# Altium PCB CNC Main Board.PcbDoc (part 2 of 2)
Units mil, origin at the board's own origin, x right, y up, seen from the top; angles counter-clockwise.
Board outline 6000 x 4000 mil, 2 copper layers (Top Layer, Bottom Layer); 82 components, 189 nets, 604 pads, 302 vias.
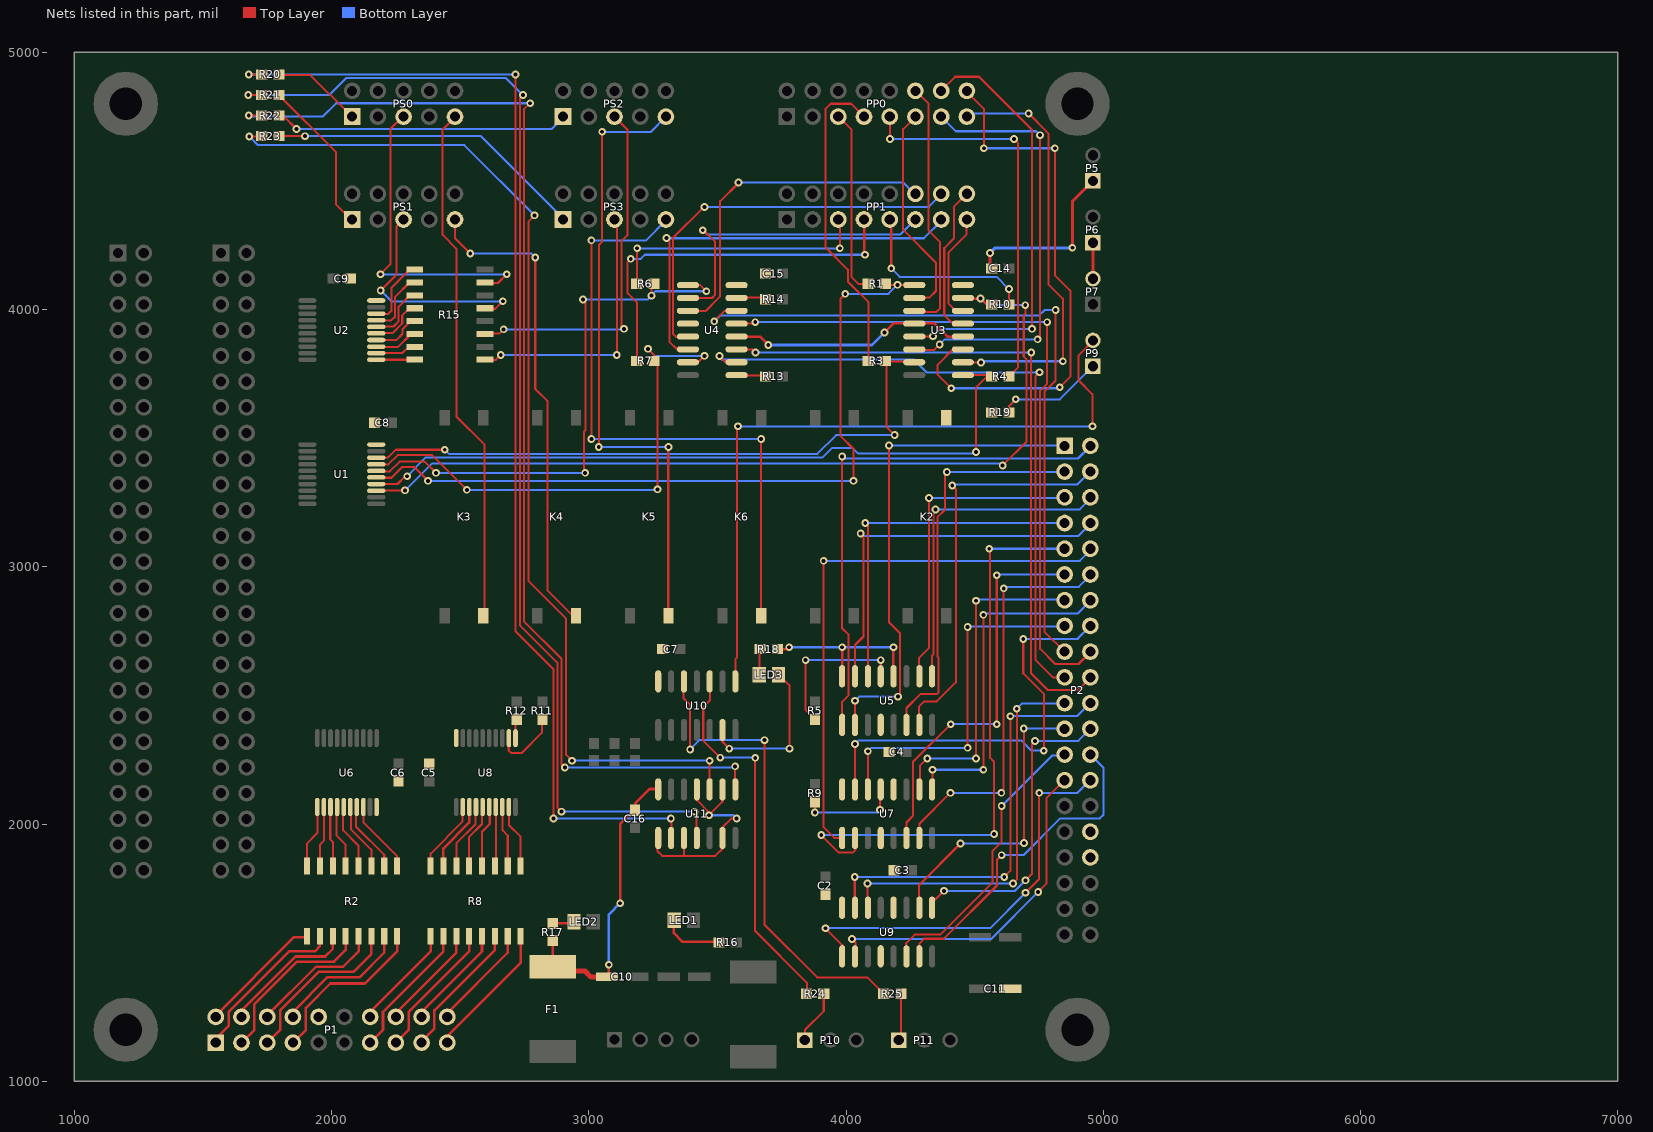
[diagram p2: the nets of this part, all layers, seen from the top]

## Via types
v1: diameter 30, hole 15, Top Layer to Bottom Layer, 220 vias
v2: diameter 30, hole 15, Top Layer to Bottom Layer, tented both sides, 42 vias
v3: diameter 30, hole 15, Top Layer to Bottom Layer, tented top, 40 vias

## Nets (pads, with @x,y where several pads share a name; then routed paths per layer and width w, separated by ;. In a path a pad name is that pad's centre, name@x,y a point inside that pad or via, vN(x,y) a via of type N, cw(c..) or ccw(c..) an arc to the next point about the centre after c; other vN are vias at no path point) (continued)
NetLED1_1: LED1.1 R16.2 | length 236.7
  Top Layer w10: LED1.1@3328,1625 3331,1622 3331,1576 3365,1542 R16.2@3502,1542 ; LED1.1@3335,1628 LED1.1@3336,1627
NetLED2_1: LED2.1 R17.2 | length 81.5
  Top Layer w10: R17.2@2860,1613.46 LED2.1@2941.46,1613.46
NetLED3_1: LED3.1 R18.1 | length 101.8
  Top Layer w8: LED3.1@3663,2577 3663,2676 R18.1@3665,2678
NetLED3_2: LED3.2 U10.6 | length 622.2
  Top Layer w8: U10.6@3518,2366 3518,2321 v1(3546,2293) ; LED3.2@3740,2580 3780,2540 v1(3780,2293)
  Bottom Layer w8: v1(3546,2293) v1(3780,2293)
NetP1_1: P1.1 R2.10 | length 643.4
  Top Layer w10: P1.1@1545,1150 1545,1160 1600,1215 1600,1270 1835,1505 1935,1505 1955,1525 R2.10@1955,1565
NetP1_2: P1.2 R2.9 | length 481.3
  Top Layer w10: P1.2@1550,1250 1550,1255 1855,1560 R2.9@1900,1560
NetP1_3: P1.3 R2.12 | length 667.7
  Top Layer w10: P1.3@1650,1150 1700,1200 1700,1300 1865,1465 2010,1465 2055,1510 R2.12@2055,1565
NetP1_4: P1.4 R2.11 | length 522.3
  Top Layer w10: P1.4@1655,1250 1655,1280 1860,1485 1975,1485 2005,1515 R2.11@2005,1560
NetP1_5: P1.5 R2.14 | length 661.8
  Top Layer w10: P1.5@1750,1150 1800,1200 1800,1275 1950,1425 2085,1425 2155,1495 R2.14@2155,1565
NetP1_6: P1.6 R2.13 | length 528.6
  Top Layer w10: P1.6@1750,1245 1750,1255 1940,1445 2045,1445 2105,1505 R2.13@2105,1565
NetP1_7: P1.7 R2.16 | length 656.8
  Top Layer w10: P1.7@1850,1150 1900,1200 1900,1285 1995,1380 2130,1380 2255,1505 R2.16@2255,1560
NetP1_8: P1.8 R2.15 | length 535.3
  Top Layer w10: P1.8@1850,1250 1850,1270 1985,1405 2110,1405 2205,1500 R2.15@2205,1565
NetP1_13: P1.13 R8.10 | length 533.1
  Top Layer w10: P1.13@2150,1150 2200,1200 2200,1270 2435,1505 R8.10@2435,1565
NetP1_14: P1.14 R8.9 | length 412.3
  Top Layer w10: P1.14@2150,1250 2150,1270 2385,1505 R8.9@2385,1565
NetP1_15: P1.15 R8.12 | length 533.1
  Top Layer w10: P1.15@2250,1150 2300,1200 2300,1270 2535,1505 R8.12@2535,1565
NetP1_16: P1.16 R8.11 | length 412.3
  Top Layer w10: P1.16@2250,1250 2250,1265 2485,1500 R8.11@2485,1565
NetP1_17: P1.17 R8.14 | length 543.1
  Top Layer w10: P1.17@2350,1150 2350,1155 2400,1205 2400,1275 2635,1510 R8.14@2635,1575
NetP1_18: P1.18 R8.13 | length 417.3
  Top Layer w10: P1.18@2350,1250 2350,1270 2585,1505 R8.13@2585,1570
NetP1_19: P1.19 R8.16 | length 538.1
  Top Layer w10: P1.19@2450,1150 2450,1175 2735,1460 R8.16@2735,1570
NetP1_20: P1.20 R8.15 | length 412.3
  Top Layer w10: P1.20@2450,1255 2450,1265 2685,1500 R8.15@2685,1570
NetP2_1: P2.1 U5.2 | length 1950.8
  Top Layer w8: U5.2@4035,2384 v3(4035,2479) ; v1(4167,3471) 4167,2785 4210,2742 4210,2503 v3(4202,2495)
  Bottom Layer w8: v3(4035,2479) 4051,2495 v3(4202,2495) ; v1(4167,3471) P2.1@4852,3471
NetP2_2: P2.2 U5.1 | length 2056.6
  Top Layer w8: U5.1@3985,2385.51 3985,2475 4010,2500 4010,2735 3985,2760 v1(3985,3429)
  Bottom Layer w8: v1(3985,3429) 3993,3421 4902,3421 P2.2@4953,3472
NetP2_3: P2.3 U5.6 | length 1553
  Top Layer w8: U5.6@4235,2385.51 4235,2451 4289,2505 4353,2505 4360,2512 4360,2646 4355,2651 4355,3193 ; 4355,3192 4385,3222 4385,3361 v1@4393,3369
  Bottom Layer w8: v1(4392,3368) 4393,3369 P2.3@4853,3369
NetP2_4: P2.4 U5.7 | length 1585.3
  Top Layer w8: U5.7@4284,2381 4284,2457 4304,2477 4353,2477 4427,2551 4427,3303 ; v1(4413,3316) 4425,3304
  Bottom Layer w8: v1(4413,3316) 4416,3319 4898,3319 P2.4@4949,3370
NetP2_5: P2.5 U5.10 | length 1229.6
  Top Layer w8: U5.10@4284,2578 4284,2646 4323,2685 v1(4323,3267)
  Bottom Layer w8: v1(4323,3267) 4324,3268 P2.5@4847,3268
NetP2_6: P2.6 U5.9 | length 1277.1
  Top Layer w8: U5.9@4335,2574.49 4335,2654 4341,2660 4341,3216 v1(4348,3223)
  Bottom Layer w8: v1(4348,3223) 4909,3223 P2.6@4953,3267
NetP2_7: P2.7 U5.14 | length 1377.7
  Top Layer w8: v1(4075,3170) 4085,3160 U5.14@4085,2574.49
  Bottom Layer w8: v1(4075,3170) P2.7@4853,3170
NetP2_8: P2.8 U5.15 | length 1494
  Top Layer w8: U5.15@4035,2574.49 4035,2696 4068,2729 4068,3118 v1(4057,3129)
  Bottom Layer w8: v1(4057,3129) 4067,3119 4902,3119 P2.8@4953,3170
NetP2_9: P2.9 U7.2 | length 2293.2
  Top Layer w8: v1(3904,1957) 3972,1889 4026,1889 4036,1899 U7.2@4036,1942 ; v1(4557,3070) 4560,3067 4560,2257 4576,2241 v1(4576,1961)
  Bottom Layer w8: v1(3904,1957) 4572,1957 v1(4576,1961) ; v1(4557,3070) 4851,3070 P2.9@4852,3069
NetP2_10: P2.10 U7.1 | length 2181.8
  Top Layer w8: v1(3913,3023) 3913,1988 3955,1946 U7.1@3983,1946
  Bottom Layer w8: v1(3913,3023) 4909,3023 4951,3065 P2.10@4951,3069
NetP2_11: P2.11 U7.6 | length 1536
  Top Layer w8: U7.6@4235,1945.51 4235,2006 4260,2031 4260,2241 v1(4407,2388) ; v1(4586,2388) v1(4586,2967)
  Bottom Layer w8: v1(4407,2388) v1(4586,2388) ; v1(4586,2967) 4589,2970 P2.11@4849,2970
NetP2_12: P2.12 U7.7 | length 1579
  Top Layer w8: U7.7@4285,1945.51 4285,2000 v1(4406,2121) ; v1(4604,2121) 4613,2130 v1(4613,2916)
  Bottom Layer w8: v1(4406,2121) v1(4604,2121) ; v1(4613,2916) 4619,2922 4905,2922 P2.12@4949,2966
NetP2_13: P2.13 U7.10 | length 1291.7
  Top Layer w8: U7.10@4287,2127 4287,2226 v1(4316,2255) ; v1(4505,2255) v1(4505,2868)
  Bottom Layer w8: v1(4316,2255) v1(4505,2255) ; v1(4505,2868) 4509,2872 P2.13@4853,2872
NetP2_14: P2.14 U7.9 | length 1319.6
  Top Layer w8: U7.9@4336,2133 v1(4336,2211) ; v1(4534,2211) v1(4534,2813)
  Bottom Layer w8: v1(4336,2211) v1(4534,2211) ; v1(4534,2813) 4539,2818 4900,2818 P2.14@4952,2870
NetP2_15: P2.15 U7.14 | length 1390.3
  Top Layer w8: U7.14@4085,2134.49 v1(4085,2283) ; v1(4473,2296) v1(4473,2766)
  Bottom Layer w8: v1(4085,2283) 4098,2296 v1(4473,2296) ; v1(4473,2766) 4474,2767 P2.15@4851,2767
NetP2_16: P2.16 U7.15 | length 1680.3
  Top Layer w8: U7.15@4035,2134.49 v1(4035,2311) ; v1(4689,2719) 4689,2586 4769,2506 v2(4769,2285)
  Bottom Layer w8: v1(4035,2311) 4049,2325 4681,2325 4721,2285 v2(4769,2285) ; v1(4689,2719) 4900,2719 4904,2723 ; 4904,2724 P2.16@4949,2769
NetP2_17: P2.17 U4.14 | length 2827.2
  Top Layer w8: v3(3488,3954) 3529,3995 U4.14@3574,3995 ; 4771,3067 4771,2748 P2.17@4850,2669 ; 4771,3068 4771,3680.2 4815,3724.2 v1(4815,3998)
  Bottom Layer w8: v3(3488,3954) 3510,3976 4750,3976 4772,3998 v1(4815,3998)
NetP2_18: P2.18 U4.13 | length 2733
  Top Layer w8: U4.13@3574,3945 3641,3945 v1(3647,3951) ; v1(4782,3951) 4782,3711 4755,3684 4755,2681 4814,2622 4904,2622 P2.18@4952,2670
  Bottom Layer w8: v1(3647,3951) v1(4782,3951)
NetP2_19: P2.19 U4.10 | length 2619
  Top Layer w8: v3(3508,3819) 3531,3796 U4.10@3576,3796 ; v1(4752,3756) 4736,3740 4736,2639 4806,2569 P2.19@4851,2569
  Bottom Layer w8: v3(3508,3819) 3508,3815 3519,3804 ; 3518,3805 4264,3805 4313,3756 v1(4752,3756)
NetP2_20: P2.20 U4.11 | length 2689.5
  Top Layer w8: U4.11@3574,3844 3637,3844 v1(3648,3833) ; v1(4720,3833) 4720,2585 4784,2521 4903,2521 P2.20@4950,2568
  Bottom Layer w8: v1(3648,3833) v1(4720,3833) ; P2.20@4937,2568 P2.20@4952,2568
NetP2_21: P2.21 U9.14 | length 1538.9
  Top Layer w8: U9.14@4084,1676 v1(4084,1769) ; v1(4649,1769) 4664,1784 v1(4664,2448)
  Bottom Layer w8: v1(4084,1769) v1(4649,1769) ; v1(4664,2448) 4685,2469 P2.21@4851,2469
NetP2_22: P2.22 U9.15 | length 1663.7
  Top Layer w8: U9.15@4034,1676 v1(4034,1794) ; v1(4615,1794) 4639,1818 v1(4639,2419)
  Bottom Layer w8: v1(4034,1794) v1(4615,1794) ; v1(4639,2419) 4898,2419 P2.22@4948,2469
NetP2_23: P2.23 U9.10 | length 1173.9
  Top Layer w8: U9.10@4284,1669 4284,1763 v1(4445,1924) ; v1(4691,2371) 4692,2372 v1(4692,1926)
  Bottom Layer w8: v1(4445,1924) 4690,1924 v1(4692,1926) ; v1(4691,2371) P2.23@4848,2371
NetP2_24: P2.24 U9.9 | length 1214.2
  Top Layer w8: U9.9@4336,1673 4336,1695 v1(4381,1740) ; v1(4698,1781) 4723,1806 4723,2311 v2(4735,2323)
  Bottom Layer w8: v1(4381,1740) 4657,1740 v1(4698,1781) ; v2(4735,2323) 4903,2323 P2.24@4952,2372
NetP2_25: P2.25 U9.6 | length 1125.9
  Top Layer w8: U9.6@4234,1483 4234,1537 4267,1570 4366,1570 4570,1774 4570,1896 4605,1931 v1(4605,2070)
  Bottom Layer w8: v1(4605,2070) 4801,2266 P2.25@4851,2266
NetP2_26: P2.26 U9.7 | length 1288.6
  Top Layer w8: U9.7@4285,1484 4285,1535 4304,1554 4380,1554 4587,1761 4587,1861 v1(4605,1879)
  Bottom Layer w8: v1(4605,1879) 4690,1879 4833,2022 4987,2022 5001,2036 5001,2218 P2.26@4949,2270
NetP2_27: P2.27 U9.2 | length 1351.7
  Top Layer w8: v3(4023,1553) 4037,1539 U9.2@4037,1486 ; v2(4747,1736) 4779,1768 4779,2100 P2.27@4851,2172
  Bottom Layer w8: v3(4023,1553) 4564,1553 v2(4747,1736)
NetP2_28: P2.28 U9.1 | length 1601.2
  Top Layer w8: v1(3920,1595) 3986,1529 U9.1@3986,1486 ; v1(4698,1733) 4751,1786 v2(4751,2121)
  Bottom Layer w8: v1(3920,1595) 4560,1595 v1(4698,1733) ; v2(4751,2121) 4900,2121 P2.28@4950,2171
NetP6_1: P6.1 P7.2 | length 141.8
  Top Layer w8: P6.1@4960,4259 P6.1@4962,4261
  Top Layer w12: P7.2@4960,4120 P6.1@4960,4259
NetP9_1: P9.1 R19.1 | length 415.4
  Top Layer w8: R19.1@4634,3597 4634,3625 v1(4660,3651)
  Bottom Layer w8: v1(4660,3651) 4831,3651 P9.1@4958,3778
NetP9_2: P9.2 U10.8 | length 2752.4
  Top Layer w8: U10.8@3570,2557 3570,2641 3576,2647 3576,3542 v1(3580,3546) ; v2(4958,3546) 4958,3671 4903,3726 4903,3821 P9.2@4962,3880
  Bottom Layer w8: v1(3580,3546) v2(4958,3546)
NetP10_1: P10.1 R24.2 | length 210.4
  Top Layer w8: P10.1@3840,1160 3840,1199 3913.46,1272.46 R24.2@3913.46,1340
NetP11_1: P11.1 R25.2 | length 185.7
  Top Layer w8: P11.1@4205,1157 4214,1166 R25.2@4214,1339
NetR1_1: R1.1 U1.15 U3.1 | length 2981.5
  Top Layer w8: U1.15@2177,3346 2233,3346 2275,3388 2321,3388 v1(2375,3334) ; v1(3997,4061) 3979,4043 3979,3508 4029,3458 v1(4029,3334) ; R1.1@4149,4100 4153,4096 4263,4096 U3.1@4264,4095
  Bottom Layer w8: v1(2375,3334) v1(4029,3334) ; v1(3997,4061) 4165,4061 v1(4200,4096)
NetR2_1: R2.1 U6.18 | length 288.8
  Top Layer w8: U6.18@2125,2070 2125,2005 2255,1875 R2.1@2255,1835
NetR2_2: R2.2 U6.17 | length 280.6
  Top Layer w8: U6.17@2095,2070 2095,1990 2205,1880 R2.2@2205,1835
NetR2_3: R2.3 U6.16 | length 263.1
  Top Layer w8: U6.16@2075,2065 2075,1980 2155,1900 R2.3@2155,1835
NetR2_4: R2.4 U6.15 | length 254.9
  Top Layer w8: U6.15@2045,2065 2045,1975 2105,1915 R2.4@2105,1835
NetR2_5: R2.5 U6.14 | length 249.5
  Top Layer w8: U6.14@2020,2070 2020,1955 2055,1920 R2.5@2055,1835
NetR2_6: R2.6 U6.13 | length 234.1
  Top Layer w8: U6.13@1995,2065 1995,1940 2005,1930 R2.6@2005,1835
NetR2_7: R2.7 U6.12 | length 236.2
  Top Layer w8: R2.7@1955,1835 1955,1920 1970,1935 U6.12@1970,2065
NetR2_8: R2.8 U6.11 | length 246.6
  Top Layer w8: R2.8@1905,1840 1905,1925 1945,1965 U6.11@1945,2070
NetR3_1: R3.1 U1.18 U3.7 | length 2492.8
  Top Layer w8: U1.18@2175,3425 2220,3425 2250,3455 v1(2440,3455) ; R3.1@4153,3798 4273,3798 U3.7@4277,3794 ; R3.1@4158,3803 4158,3543 v1(4189,3512)
  Bottom Layer w8: v1(2440,3455) 2456,3439 3889,3439 3962,3512 v1(4189,3512)
NetR4_1: R4.1 U1.14 U3.9 | length 2852.3
  Top Layer w8: U1.14@2173.86,3321.61 2256.61,3321.61 2287,3352 v1(2294,3352) ; U3.9@4454.49,3745 4558,3745 R4.1@4563,3740 ; v1(4505,3446) 4505,3696 4549,3740 R4.1@4566.54,3740 ; R4.1@4570,3737 R4.1@4579,3728
  Bottom Layer w8: v1(2294,3352) 2367,3425 3909,3425 3945,3461 4026,3461 4046,3441 4500,3441 v1(4505,3446)
NetR5_2: R5.2 U5.13 | length 604
  Top Layer w8: v1(3843,2637) 3842,2636 3842,2444.54 R5.2@3880,2406.54 ; v1(4135,2637) 4135,2573 U5.13@4136,2572
  Bottom Layer w8: v1(3843,2637) v1(4135,2637)
NetR6_1: R6.1 U1.16 U4.1 | length 2144.9
  Top Layer w8: U1.16@2176,3371 2227,3371 2265,3409 2362,3409 v1(2406,3365) ; v1(2978,4039) 2987,4030 2987,3530 2981,3524 2981,3370 v1(2986,3365) ; v1(3244,4054) 3244,4093 R6.1@3249,4098 ; R6.1@3245,4104 R6.1@3248,4107 ; U4.1@3389,4096 3432,4096 v3(3457,4071)
  Bottom Layer w8: v1(2406,3365) v1(2986,3365) ; v1(2978,4039) 3229,4039 v1(3244,4054) ; v1@3245,4057 3259,4071 v3(3457,4071)
NetR7_1: R7.1 U1.17 U4.7 | length 2065
  Top Layer w8: U1.17@2175,3398 2221,3398 2257,3434 2391,3434 v1(2526,3299) ; v1(3230,3847) 3255,3822 R7.1@3255,3798 ; R7.1@3249,3801 R7.1@3255,3795 ; v1(3267,3301) R7.1@3267,3789 ; U4.7@3381,3794 U4.7@3419,3794 ; U4.7@3385,3796 3426,3796 v3(3450,3820)
  Bottom Layer w8: v1(2526,3299) 3265,3299 v1(3267,3301) ; v1@3229,3848 3257,3820 v3(3450,3820)
NetR8_1: R8.1 U8.9 | length 248.6
  Top Layer w8: U8.9@2690,2065 2690,1995 2735,1950 R8.1@2735,1835
NetR8_2: R8.2 U8.8 | length 238.3
  Top Layer w8: U8.8@2665,2065 2665,1975 2685,1955 R8.2@2685,1835
NetR8_3: R8.3 U8.7 | length 232.1
  Top Layer w8: R8.3@2635,1835 2635,1840 2640,1845 U8.7@2640,2065
NetR8_4: R8.4 U8.6 | length 247.4
  Top Layer w8: R8.4@2585,1835 2585,1970 2615,2000 U8.6@2615,2070
NetR8_5: R8.5 U8.5 | length 250.7
  Top Layer w8: R8.5@2535,1835 2535,1950 2585,2000 U8.5@2585,2065
NetR8_6: R8.6 U8.4 | length 271.1
  Top Layer w8: R8.6@2485,1830 2485,1925 2560,2000 U8.4@2560,2070
NetR8_7: R8.7 U8.3 | length 276.4
  Top Layer w10: R8.7@2435,1835 2435,1905 2535,2005 U8.3@2535,2070
NetR8_8: R8.8 U8.2 | length 286.8
  Top Layer w8: R8.8@2385,1835 2385,1885 2510,2010 U8.2@2510,2070
NetR9_2: R9.2 U7.13 | length 382.4
  Top Layer w8: v1(3879,2045) 3882,2048 R9.2@3882,2088 ; v3(4132,2055) U7.13@4132,2136
  Bottom Layer w8: v1(3879,2045) 4122,2045 v3(4132,2055)
NetR10_1: R10.1 U1.13 U3.15 | length 3442.6
  Top Layer w8: U1.13@2177,3297 v1(2286,3297) ; U3.15@4460,4042 v1@4525,4042 ; v1(4523,4043) 4546,4020 R10.1@4567,4020 ; v1@4610,3394 4701,3485 4701,3807 4691,3817 4691,3977 4697,3983 v1(4697,4017)
  Bottom Layer w8: v1(2286,3297) 2390,3401 4602,3401 v1(4609,3394) ; v1(4523,4043) 4549,4017 v1@4691,4017
NetR11_2: R11.2 U8.12 | length 270
  Top Layer w8: U8.12@2689,2336 2689,2285 2698,2276 2740,2276 2818,2354 R11.2@2818,2408
NetR12_2: R12.2 U8.11 | length 69
  Top Layer w8: U8.11@2715,2336 R12.2@2715,2405
NetR13_2: R13.2 U4.9 | length 113.7
  Top Layer w8: U4.9@3574,3744 3682,3744 R13.2@3686,3740
NetR14_2: R14.2 U4.15 | length 114.5
  Top Layer w8: U4.15@3577,4046 3683,4046 R14.2@3689,4040
NetR15_1: R15.1 U2.18 | length 270.1
  Top Layer w8: U2.18@2177,3983 2221,3983 2233,3995 2233,4085 2301,4153 R15.1@2324,4153
NetR15_2: R15.2 U2.17 | length 257.4
  Top Layer w8: U2.17@2175,3958 2232,3958 2247,3973 2247,4049 2303,4105 R15.2@2327,4105
NetR15_3: R15.3 U2.16 | length 230.7
  Top Layer w8: U2.16@2173,3934 2241,3934 2261,3954 2261,4011 2303,4053 R15.3@2321,4053
NetR15_4: R15.4 U2.15 | length 203.9
  Top Layer w8: U2.15@2173,3908 2237,3908 2275,3946 2275,3977 2302,4004 R15.4@2319,4004
NetR15_5: R15.5 U2.14 | length 188.5
  Top Layer w8: U2.14@2175,3882 2253,3882 2276,3905 2276,3924 2305,3953 R15.5@2323,3953
NetR15_6: R15.6 U2.13 | length 166.7
  Top Layer w8: U2.13@2176,3855 2259,3855 2309,3905 R15.6@2322,3905
NetR15_7: R15.7 U2.12 | length 160.4
  Top Layer w8: U2.12@2176,3831 2275,3831 2300,3856 R15.7@2326,3856
NetR15_8: R15.8 U2.11 | length 153.2
  Top Layer w8: U2.11@2173.86,3804.84 2326.84,3804.84 R15.8@2327,3805
NetR20_1: R20.1 U11.2 | length 4571.2
  Top Layer w8: v1(1678,4914) R20.1@1728.54,4914 ; v2(2715,4914) 2715,2750 2863,2602 v1(2863,2021) ; U11.2@3321,1945.51 v3@3321,2019
  Bottom Layer w8: v1(1678,4914) 2712,4914 v2@2714,4916 ; v1(2863,2021) v3(3319,2021)
NetR21_1: R21.1 U11.4 | length 4658.6
  Top Layer w8: v1(1676,4834) R21.1@1730,4834 ; v2(2744,4834) 2732,4822 2732,2773 2878,2627 2878,2064 v1(2894,2048) ; v3(3411,2048) 3418,2041 U11.4@3418,1946
  Bottom Layer w8: v1@1675,4834 1992,4834 ; 1991,4834 2057,4900 2678,4900 v2(2744,4834) ; v1(2894,2048) v3(3411,2048)
NetR22_1: R22.1 U11.8 | length 4579.3
  Top Layer w8: v1(1678,4754) R22.1@1727,4754 ; v2(2772,4802) 2748,4778 2748,2788 2894,2642 2894,2233 v1(2907,2220) ; v1(3569,2224) 3569,2142 U11.8@3574,2137
  Bottom Layer w8: v1@1675,4755 1679,4751 1967,4751 2018,4802 v2(2772,4802) ; v1(2907,2220) 3565,2220 v1(3569,2224)
NetR23_1: R23.1 U11.10 | length 4133.1
  Top Layer w8: v1(1680,4673) R23.1@1726,4673 ; v2(2789,4366) 2766,4343 2766,2944 2912,2798 2912,2269 v1(2935,2246) ; v1(3470,2246) 3470,2131 U11.10@3471,2130
  Bottom Layer w8: v1(1680,4673) 1714,4639 2516,4639 v2(2789,4366) ; v1(2935,2246) v1(3470,2246)
NetR24_1: R24.1 U10.10 | length 1472.8
  Top Layer w8: U10.10@3471,2552 3471,2480 3445,2454 3445,2324 v1(3511,2258) ; v1(3647,2257) 3647,1584 3848,1383 R24.1@3848,1336
  Bottom Layer w8: v1(3511,2258) 3646,2258 v1(3647,2257)
NetR25_1: R25.1 U10.12 | length 1876.5
  Top Layer w8: U10.12@3369,2558 3369,2488 3394,2463 v1(3394,2290) ; v1(3683,2326) 3683,1609 3888,1404 4082,1404 R25.1@4148,1338
  Bottom Layer w8: v1(3394,2290) 3430,2326 v1(3683,2326)
NetU11_1: U11.1 U11.3 U11.6 U11.9 U11.11 | length 896.2
  Top Layer w8: U11.1@3268,1945.51 3268,1893 3285,1876 3492,1876 3520,1904 3520,1987 3554,2021 v3(3575,2021) ; 3371,1877 U11.3@3371,1943 ; U11.11@3421,2134 3421,2092 3467,2046 v3@3467,2035 ; v3(3467,2034) 3519,2086 U11.9@3519,2136
  Bottom Layer w8: v3(3467,2034) 3562,2034 v3(3575,2021)
PWM0_ENABLE: PP0.9 R4.2 | length 1514.3
  Top Layer w8: v2(4171,4663) PP0.9@4171,4751 ; R4.2@4633.46,3740 4669,3775.54 4669,4647 v2(4653,4663)
  Bottom Layer w8: v2(4171,4663) v2(4653,4663)
PWM0_ENABLE_A: PP0.15 U3.10 | length 1654.3
  Top Layer w8: U3.10@4454,3794 v1(4525,3794) ; v1(4710,4762) 4787,4685 4787,4098 4843,4042 v1(4843,3799)
  Bottom Layer w8: PP0.15@4469,4752 4479,4762 v1(4710,4762) ; v1(4525,3794) 4530,3799 v1(4843,3799)
PWM0_ENABLE_B: PP0.16 U3.11 | length 2158.9
  Top Layer w8: v1(4409,3694) 4355,3748 4355,3784 4416,3845 U3.11@4458,3845 ; PP0.16@4469,4847 4536,4780 v2(4536,4627) ; v1(4812,4627) 4812,4133 4872,4073 4872,3739 v1(4831,3698)
  Bottom Layer w8: v1(4409,3694) 4827,3694 v1(4831,3698) ; v2(4536,4627) v1(4812,4627)
PWM0_NEG: PP0.5 R1.2 | length 721.9
  Top Layer w8: PP0.5@3971,4750 4022,4699 4022,4126 4048,4100 R1.2@4088,4100
PWM0_NEG_A: PP0.11 U3.2 | length 844.1
  Top Layer w8: U3.2@4268,4046 4324,4046 4350,4072 4350,4182 4222,4310 4222,4701 PP0.11@4271,4750
PWM0_NEG_B: PP0.12 U3.3 | length 988.1
  Top Layer w8: U3.3@4268,3991 4352,3991 4366,4005 4366,4262 4321,4307 4321,4800 PP0.12@4271,4850
PWM0_POS: PP0.7 R3.2 | length 1222.9
  Top Layer w8: PP0.7@4068,4752 4020,4800 3940,4800 3921,4781 3921,4241 4007,4155 4007,4109 4088,4028 R3.2@4088,3802
PWM0_POS_A: PP0.13 U3.6 | length 1698.3
  Top Layer w8: U3.6@4271,3843 4343,3843 v3(4364,3864) ; v1(4745,3884) 4754,3893 v1(4754,4678)
  Bottom Layer w8: v3(4364,3864) 4384,3884 v1(4745,3884) ; PP0.13@4373,4747 4427,4693 4739,4693 v1(4754,4678)
PWM0_POS_B: PP0.14 U3.5 | length 1703.1
  Top Layer w8: U3.5@4268,3896 v3(4338,3896) ; PP0.14@4369,4850 4424,4905 4517,4905 4723,4699 v1(4723,3925)
  Bottom Layer w8: v3(4338,3896) 4367,3925 v1(4723,3925)
PWM1_ENABLE: PP1.9 R10.2 | length 742.1
  Top Layer w8: PP1.9@4174,4351 4176,4349 v1(4176,4160) ; R10.2@4633.46,4020 v1(4633.46,4079.46)
  Bottom Layer w8: v1(4176,4160) 4209,4127 4585.93,4127 v1(4633.46,4079.46)
PWM1_ENABLE_A: PP1.15 U3.14 | length 426.2
  Top Layer w8: U3.14@4455,3993 4429,3993 4398,4024 4398,4221 4469,4292 PP1.15@4469,4351
PWM1_ENABLE_B: PP1.16 U3.13 | length 594.9
  Top Layer w8: U3.13@4457,3946 4414,3946 4382,3978 4382,4239 4419,4276 4419,4400 PP1.16@4468,4449
PWM1_NEG: PP1.5 R6.2 | length 1040.1
  Top Layer w8: R6.2@3188,4101 v2(3188,4238) ; PP1.5@3971,4351 3976,4346 v2(3976,4238)
  Bottom Layer w8: v2(3188,4238) v2(3976,4238)
PWM1_NEG_A: PP1.11 U4.2 | length 1234.5
  Top Layer w8: U4.2@3390,4045 3479,4045 3491,4057 3491,4263 v2@3446,4308
  Bottom Layer w8: v2(3443,4308) 3460,4291 4210,4291 PP1.11@4270,4351
PWM1_NEG_B: PP1.12 U4.3 | length 1327.9
  Top Layer w8: U4.3@3385,3994 3454,3994 3511,4051 3511,4421 v2@3584,4494
  Bottom Layer w8: v2(3582,4494) 4222,4494 PP1.12@4268,4448
PWM1_POS: PP1.7 R7.2 | length 1476.2
  Top Layer w8: v1(3163,4197) 3151,4185 3151,4063 3188,4026 R7.2@3188,3799 ; PP1.7@4071,4352 4071,4216 v2(4074,4213)
  Bottom Layer w8: v1(3163,4197) 3202,4197 3218,4213 v2(4074,4213)
PWM1_POS_A: PP1.13 U4.6 | length 1597.8
  Top Layer w8: v2(3302,4278) 3313,4267 3313,3875 3343,3845 U4.6@3388,3845
  Bottom Layer w8: v2@3302,4277 4303,4277 PP1.13@4375,4349
PWM1_POS_B: PP1.14 U4.5 | length 1557.6
  Top Layer w8: U4.5@3391,3894 3339,3894 3327,3906 3327,4278 v2@3449,4400
  Bottom Layer w8: v2(3450,4399) 4322,4399 PP1.14@4373,4450
STEP0_DIR: PS0.5 R15.15 | length 1236.9
  Top Layer w8: v1(2190,4137) 2229,4176 2229,4702 PS0.5@2279,4752 ; R15.15@2601,4103 2647,4103 v1(2681,4137)
  Bottom Layer w8: v1(2190,4137) v1(2681,4137)
STEP0_DISABLE: PS0.1 R20.2 | length 350.4
  Top Layer w8: R20.2@1795,4911 1918,4911 2076,4753 PS0.1@2080,4753
STEP0_STEP: K3.4 PS0.9 | length 2032.6
  Top Layer w8: PS0.9@2483,4751 2432,4700 2432,4290 2485,4237 2485,3584 2595,3474 K3.4@2595,2807
STEP1_DIR: PS1.5 R15.13 | length 882.3
  Top Layer w8: v1(2191,4074) 2253,4136 2253,4323 PS1.5@2280,4350 ; R15.13@2601,4003 2637,4003 v1(2666,4032)
  Bottom Layer w8: v1(2191,4074) 2233,4032 v1(2666,4032)
STEP1_DISABLE: PS1.1 R21.2 | length 605.9
  Top Layer w8: R21.2@1795.46,4834 2018,4611.46 2018,4408 PS1.1@2080,4346
STEP1_STEP: K4.4 PS1.9 | length 1879.7
  Top Layer w8: PS1.9@2480,4348 2480,4277 v2(2539,4218) ; v1(2792,4202) 2792,3691 2840,3643 2840,2907 2936,2811 K4.4@2951,2811
  Bottom Layer w8: v2(2539,4218) 2776,4218 v1(2792,4202)
STEP2_DIR: PS2.5 R15.11 | length 1403.4
  Top Layer w8: R15.11@2598,3906 2652,3906 v1(2669,3923) ; PS2.5@3102,4748 3150,4700 3150,4288 3127,4265 3127,3935 v1(3137,3925)
  Bottom Layer w8: v1(2669,3923) 3135,3923 v1(3137,3925)
STEP2_DISABLE: PS2.1 R22.2 | length 1151.4
  Top Layer w8: R22.2@1795.46,4754 1812,4754 v2(1864,4702)
  Bottom Layer w8: v2(1864,4702) 2856,4702 PS2.1@2905,4751
STEP2_STEP: K5.4 PS2.9 | length 2431.8
  Top Layer w8: v1(3039,3466) 3039,4251 3052,4264 v2(3052,4691) ; K5.4@3309,2808 3309,3465 v1(3310,3466)
  Bottom Layer w8: v1(3039,3466) v1(3310,3466) ; v2(3052,4691) 3242,4691 PS2.9@3300,4749
STEP3_DIR: PS3.5 R15.9 | length 1044.9
  Top Layer w8: R15.9@2602,3804 2639,3804 v1(2658,3823) ; PS3.5@3104,4351 3109,4346 v1(3109,3823)
  Bottom Layer w8: v1(2658,3823) v1(3109,3823)
STEP3_DISABLE: PS3.1 R23.2 | length 1243.7
  Top Layer w8: R23.2@1795.46,4674 v2(1897,4674)
  Bottom Layer w8: v2(1897,4674) 2581,4674 PS3.1@2905,4350
STEP3_STEP: K6.4 PS3.9 | length 2440.9
  Top Layer w8: v1(3010,3497) v2(3010,4269) ; K6.4@3670,2810 v1(3670,3497)
  Bottom Layer w8: v1(3010,3497) v1(3670,3497) ; v2(3010,4269) 3223,4269 PS3.9@3300,4346
VCC: C2.1 C3.1 C4.1 C5.1 C6.1 C7.1 C8.1 C9.1 C10.1 C11.1 C14.1 C15.1 C16.1 F1.1 K2.3 P1.10 P2.32 P2.34 P5.1 R17.1 R18.2 R19.2 U1.20 U2.20 U3.4 U3.12 U3.16 U4.4 U4.12 U4.16 U5.4 U5.12 U5.16 U6.20 U7.4 U7.12 U7.16 U8.20 U9.4 U9.12 U9.16 U10.14 U11.14 | length 3478.1
  Top Layer w10: F1.1@2860,1445 R17.1@2860,1543 ; C10.1@3077,1405 3077,1452 v3(3078,1453) ; v1(3122,1692) 3122,2000 C16.1@3177,2055 ; C16.1@3180,2055 3180,2080 3236,2136 U11.14@3270,2136 ; U4.12@3578,3895 3665,3895 v1(3698,3862) ; R18.2@3734,2680 3772,2680 v1(3779,2687) ; U5.16@3985,2574.49 v1(3985,2687) ; v1(4150,3911) 4186,3947 4342,3947 4394,3895 U3.12@4457,3895 ; U5.12@4184,2569 4184,2686 v1(4185,2687)
  Top Layer w12: C14.1@4560,4160 v1(4560,4220) ; v1(4880,4240) 4880,4420 P5.1@4960,4500
  Top Layer w20: F1.1@2860,1445 2877,1428 2985,1428 3008,1405 C10.1@3074,1405 ; C10.1@3067,1407 C10.1@3070,1404
  Bottom Layer w10: v3(3078,1453) 3078,1648 v1(3122,1692) ; v1(3698,3862) 4101,3862 v1(4150,3911) ; v1(3779,2687) v1(4185,2687)
  Bottom Layer w12: v1(4560,4220) 4580,4240 v1(4880,4240)
pads on no net: P3.49 P4.49 U1.11 U1.12 U11.12 U11.13

## Polygon pours and split planes (outlines as drawn)
GND on Top Layer "Bottom Layer-No Net" (solid, remove dead copper, pour order 1000): 1720,4980 4540,4980 4540,4300 1720,4300 1720,4980
GND on Top Layer "Bottom Layer-No Net" (solid, remove dead copper, pour order 1001): 1720,4980 1200,4980 1020,4800 1020,1200 1200,1020 1720,1020 1720,4980
VCC on Top Layer "Bottom Layer-No Net" (solid, remove dead copper, pour order 1002): 1740,1020 1740,4280 4560,4280 4560,4980 4900,4980 5080,4800 5080,1200 4900,1020 1740,1020
GND on Bottom Layer "Bottom Layer-No Net" (solid, remove dead copper, pour order 1003): 1200,1020 4900,1020 5080,1200 5080,4800 4900,4980 1200,4980 1020,4800 1020,1200 1200,1020

## Silkscreen, mask and mechanical layers (free items; w line width, h text height)
Top Overlay:
  region: 1330,1510 1080,1510 1080,1350 1330,1350
  lines w10: 1075,4425 1075,4505 1720,4505 1720,4425 ; 1350,1385 1350,1470 1880,1470 1880,1380 ; 4720,2820 4635,2820 4635,3440 4720,3440
  text "PS0-PS3" at 1230,4635 h50
  text "PP0,PP1" at 1475,4635 h50
  text "STEP0" at 1030,4580 h50
  text "STEP2" at 1240,4580 h50
  text "PWM0" at 1450,4580 h50
  text "STEP1" at 1030,4525 h50
  text "STEP3" at 1240,4525 h50
  text "PWM1" at 1450,4525 h50
  text "TO MESA I/O" at 1230,4445 h60
  text "ESTOP CONNECTIONS" at 1810,3055 h50
  text "P5 - ESTOP RESET" at 1810,3005 h50
  text "P6, P7 - ESTOP LOOP" at 1810,2960 h50
  text "TO CNC MACHINE" at 4695,2950 h60 r90
  text "P9 - ESTOP LED" at 1810,2915 h50
  text "P10,P11 - SSR OUTPUTS" at 1810,2870 h50
  text "TANGENT AUDIO CNC" at 1840,2580 h86
  text "BREAKOUT BOARD" at 1900,2490 h86
  text "ESTOP" at 3652,2482 h60
  text "www.tangentaudio.com" at 1835,2430 h70
  text "P8 - POWER IN" at 3530,1755 h50
  text "+5 | G | G |+12" at 3520,1690 h60
  text "+12V" at 3305,1684 h60
  text "+5V" at 2932,1682 h60
  text "2012JAN14 REV01" at 1035,1540 h70
  text "EXPANSION I/O" at 1465,1405 h60
  text "SER#" at 1065,1370 h60 r90
Mechanical 1:
  lines w10: 1000,1200 ccw(c1200,1200) 1200,1000 4900,1000 ccw(c4900,1200) 5100,1200 5100,4800 ccw(c4900,4800) 4900,5000 1200,5000 ccw(c1200,4800) 1000,4800 1000,1200
Mechanical 13:
  lines w10: 1020,1200 1200,1020 4900,1020 5080,1200 5080,4800 4900,4980 1200,4980 1020,4800 1020,1200

## Text inside footprints (layer, text, board x,y; h text height)
P1: Top Overlay "19" at 2497.24,1120.47 h59.06; Top Overlay "20" at 2497.24,1220.47 h59.06; Top Overlay "1" at 1483.08,1120.47 h59.06; Top Overlay "2" at 1463.4,1220.47 h59.06
P2: Top Overlay "2" at 4920.47,3556.6 h59.06 r270; Top Overlay "1" at 4820.47,3536.92 h59.06 r270; Top Overlay "40" at 4920.47,1522.76 h59.06 r270; Top Overlay "39" at 4820.47,1522.76 h59.06 r270
P3: Top Overlay "49" at 1140.47,1772.76 h59.06 r270; Top Overlay "50" at 1240.47,1772.76 h59.06 r270; Top Overlay "1" at 1140.47,4286.92 h59.06 r270; Top Overlay "2" at 1240.47,4306.6 h59.06 r270
P4: Top Overlay "2" at 1640.47,4306.6 h59.06 r270; Top Overlay "1" at 1540.47,4286.92 h59.06 r270; Top Overlay "50" at 1640.47,1772.76 h59.06 r270; Top Overlay "49" at 1540.47,1772.76 h59.06 r270
PP0: Top Overlay "15" at 4517.24,4720.47 h59.06; Top Overlay "16" at 4517.24,4820.47 h59.06; Top Overlay "1" at 3703.08,4720.47 h59.06; Top Overlay "2" at 3683.4,4820.47 h59.06
PP1: Top Overlay "15" at 4517.24,4320.47 h59.06; Top Overlay "16" at 4517.24,4420.47 h59.06; Top Overlay "1" at 3703.08,4320.47 h59.06; Top Overlay "2" at 3683.4,4420.47 h59.06
PS0: Top Overlay "2" at 1993.4,4820.47 h59.06; Top Overlay "1" at 2013.08,4720.47 h59.06; Top Overlay "10" at 2527.24,4820.47 h59.06; Top Overlay "9" at 2527.24,4720.47 h59.06
PS1: Top Overlay "2" at 1993.4,4420.47 h59.06; Top Overlay "1" at 2013.08,4320.47 h59.06; Top Overlay "10" at 2527.24,4420.47 h59.06; Top Overlay "9" at 2530,4330 h59.06
PS2: Top Overlay "2" at 2813.4,4820.47 h59.06; Top Overlay "1" at 2833.08,4720.47 h59.06; Top Overlay "10" at 3347.24,4820.47 h59.06; Top Overlay "9" at 3347.24,4720.47 h59.06
PS3: Top Overlay "2" at 2813.4,4420.47 h59.06; Top Overlay "1" at 2833.08,4320.47 h59.06; Top Overlay "10" at 3347.24,4420.47 h59.06; Top Overlay "9" at 3347.24,4320.47 h59.06